# EAGLE board 8FA (EAGLE 9.4.2)
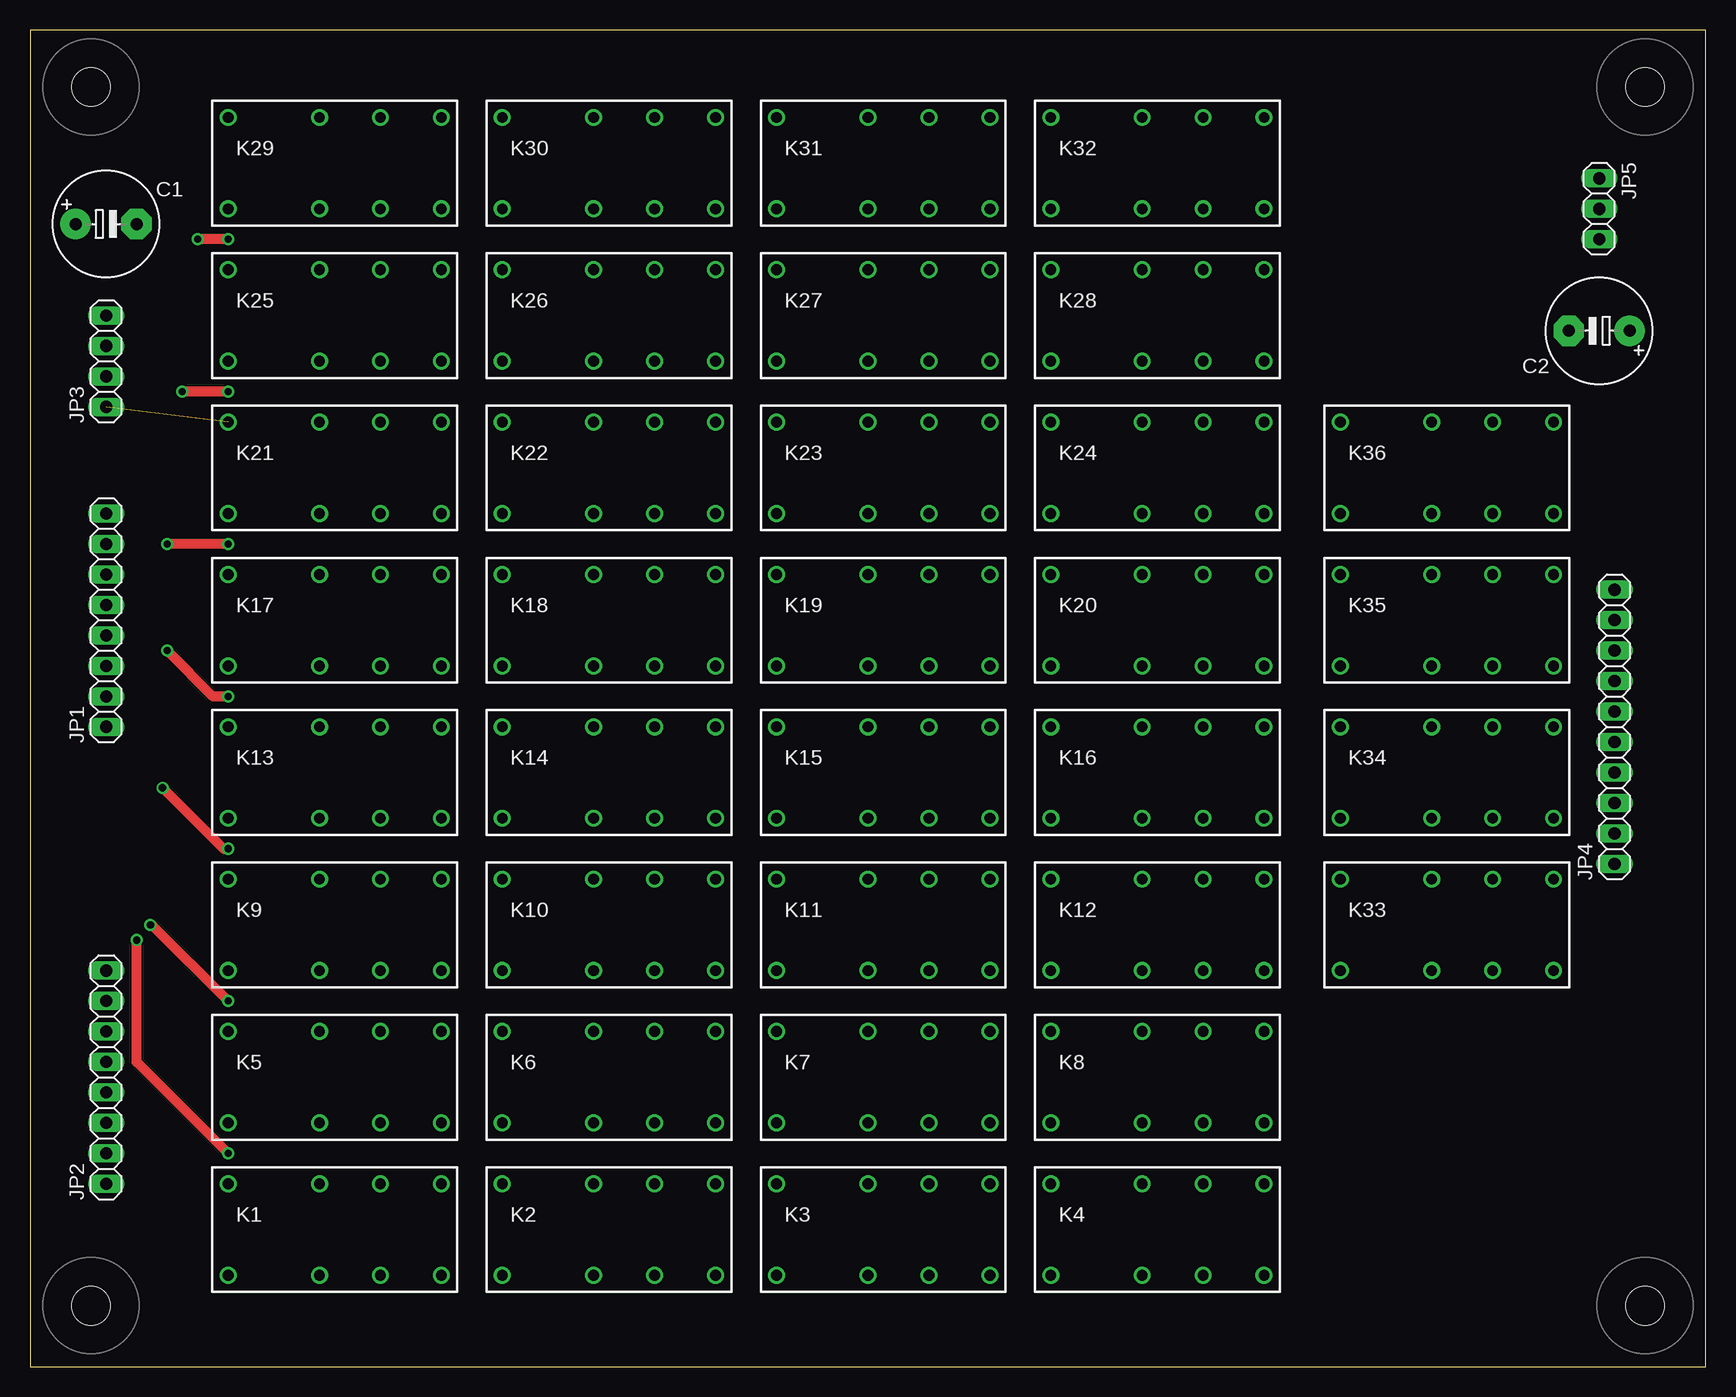
[diagram p0: board, top side]
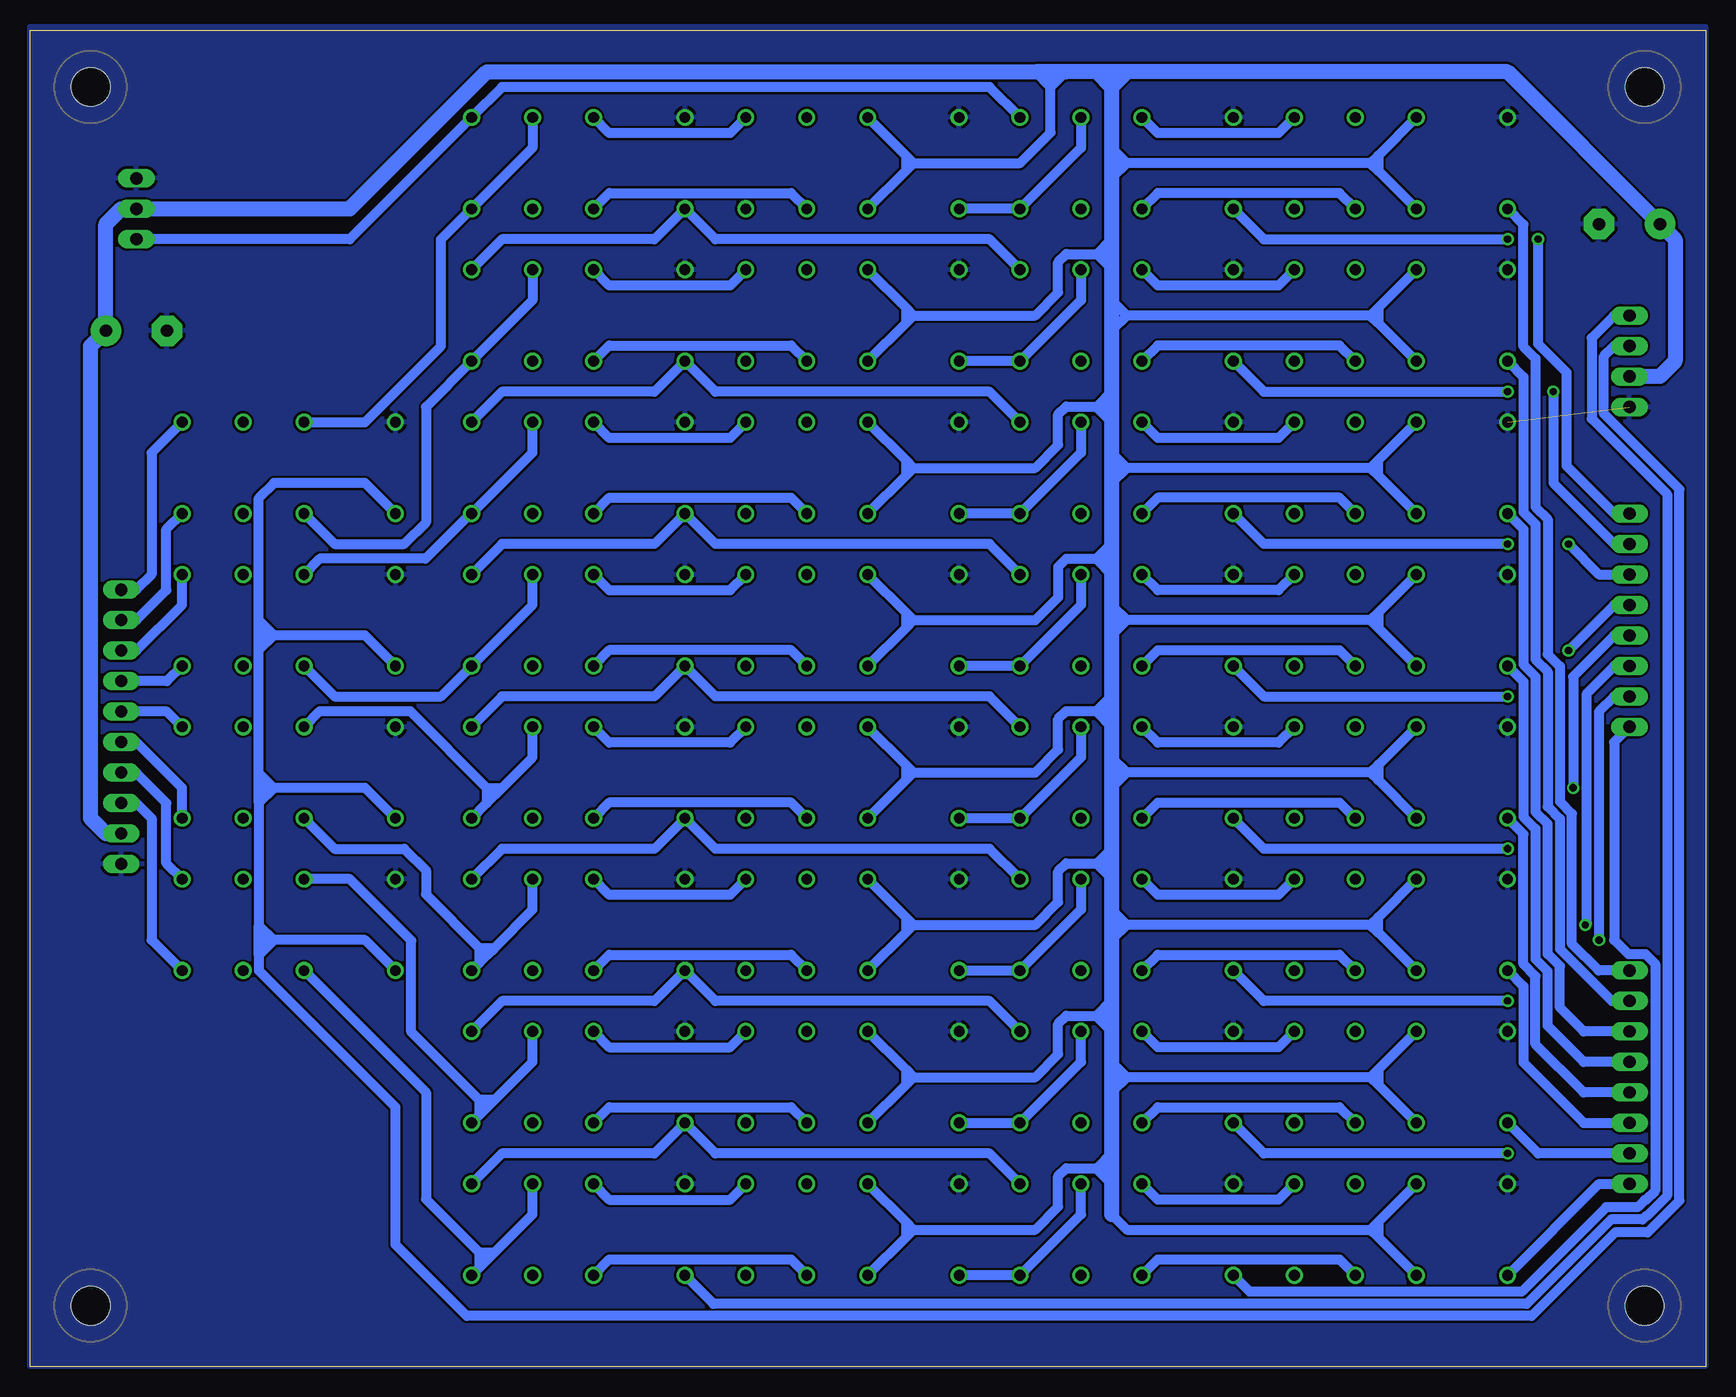
[diagram p1: board, bottom side, seen from below]

Size 139.68 x 111.43 mm. Coordinates in mm from the lower left corner, seen from the top.
Outline: 0,0 139.68,0 139.68,111.43 0,111.43 0,0
Copper layers (1*16): Top 0.0356mm / dielectric 1.5011mm / Bottom 0.0356mm
Design rules "formitaminimum": minimum track width 5mil, minimum drill 0.5994mm, track to track 0.2007mm, track to pad 0.2007mm, pad to pad 0.2007mm, via to via 0.2007mm, smd to smd 0mil, copper to edge 0mil, drill to drill 1mil, minimum pad ring 10mil, minimum via ring 8mil, stop-mask expansion 4mil, vias tented up to drill 1mm, thermal gap 10mil
Net classes: 0 default: width 0.813 mm

## Footprints (pad centres in the part's own frame; a part is rotated, then mirrored left to right if it is on the bottom)
E5-8,5 = drill 1.016 pad 2.54: + -2.54,0 | drill 1.016 pad 2.54 octagon: - 2.54,0
1X08 = drill 1.016 long: 1 -8.89,0; 2 -6.35,0; 3 -3.81,0; 4 -1.27,0; 5 1.27,0; 6 3.81,0; 7 6.35,0; 8 8.89,0
1X04 = drill 1.016 long: 1 -3.81,0; 2 -1.27,0; 3 1.27,0; 4 3.81,0
1X10 = drill 1.016 long: 1 -11.43,0; 2 -8.89,0; 3 -6.35,0; 4 -3.81,0; 5 -1.27,0; 6 1.27,0; 7 3.81,0; 8 6.35,0; 9 8.89,0; 10 11.43,0
1X03 = drill 1.016 long: 1 -2.54,0; 2 0,0; 3 2.54,0
DS-BT = drill 0.9: 1 -8.89,-3.81; 4 -1.27,-3.81; 6 3.81,-3.81; 8 8.89,-3.81; 9 8.89,3.81; 11 3.81,3.81; 13 -1.27,3.81; 16 -8.89,3.81
HOLE_3.2 = hole 3.2: 0,0

## Placement (x,y rotation side)
C1  [E5-8,5]  6.35,95.25 0 top
C2  [E5-8,5]  130.81,86.36 180 top
JP1  [1X08]  6.35,62.23 90 top
JP2  [1X08]  6.35,24.13 90 top
JP3  [1X04]  6.35,83.82 90 top
JP4  [1X10]  132.08,53.34 90 top
JP5  [1X03]  130.81,96.52 270 top
K1  RELAY5V  [DS-BT]  25.4,11.43 0 top
K2  RELAY5V  [DS-BT]  48.26,11.43 0 top
K3  RELAY5V  [DS-BT]  71.12,11.43 0 top
K4  RELAY5V  [DS-BT]  93.98,11.43 0 top
K5  RELAY5V  [DS-BT]  25.4,24.13 0 top
K6  RELAY5V  [DS-BT]  48.26,24.13 0 top
K7  RELAY5V  [DS-BT]  71.12,24.13 0 top
K8  RELAY5V  [DS-BT]  93.98,24.13 0 top
K9  RELAY5V  [DS-BT]  25.4,36.83 0 top
K10  RELAY5V  [DS-BT]  48.26,36.83 0 top
K11  RELAY5V  [DS-BT]  71.12,36.83 0 top
K12  RELAY5V  [DS-BT]  93.98,36.83 0 top
K13  RELAY5V  [DS-BT]  25.4,49.53 0 top
K14  RELAY5V  [DS-BT]  48.26,49.53 0 top
K15  RELAY5V  [DS-BT]  71.12,49.53 0 top
K16  RELAY5V  [DS-BT]  93.98,49.53 0 top
K17  RELAY5V  [DS-BT]  25.4,62.23 0 top
K18  RELAY5V  [DS-BT]  48.26,62.23 0 top
K19  RELAY5V  [DS-BT]  71.12,62.23 0 top
K20  RELAY5V  [DS-BT]  93.98,62.23 0 top
K21  RELAY5V  [DS-BT]  25.4,74.93 0 top
K22  RELAY5V  [DS-BT]  48.26,74.93 0 top
K23  RELAY5V  [DS-BT]  71.12,74.93 0 top
K24  RELAY5V  [DS-BT]  93.98,74.93 0 top
K25  RELAY5V  [DS-BT]  25.4,87.63 0 top
K26  RELAY5V  [DS-BT]  48.26,87.63 0 top
K27  RELAY5V  [DS-BT]  71.12,87.63 0 top
K28  RELAY5V  [DS-BT]  93.98,87.63 0 top
K29  RELAY5V  [DS-BT]  25.4,100.33 0 top
K30  RELAY5V  [DS-BT]  48.26,100.33 0 top
K31  RELAY5V  [DS-BT]  71.12,100.33 0 top
K32  RELAY5V  [DS-BT]  93.98,100.33 0 top
K33  RELAY5V  [DS-BT]  118.11,36.83 0 top
K34  RELAY5V  [DS-BT]  118.11,49.53 0 top
K35  RELAY5V  [DS-BT]  118.11,62.23 0 top
K36  RELAY5V  [DS-BT]  118.11,74.93 0 top
U$1  [HOLE_3.2]  5.08,106.68 0 top
U$2  [HOLE_3.2]  134.62,106.68 0 top
U$3  [HOLE_3.2]  134.62,5.08 0 top
U$4  [HOLE_3.2]  5.08,5.08 0 top

## Library data of the parts
C1 C2 = Passive_Robotech
JP1-JP5 = pinhead
K1-K36 = My
U$1-U$4 = Document_Robotech

## Nets
+5V: C1.+ C2.+ JP3.2 JP4.2 JP5.2 K1.4 K1.13 K3.4 K3.13 K5.4 K5.13 K7.4 K7.13 K9.4 K9.13 K11.4 K11.13 K13.4 K13.13 K15.4 K15.13 K17.4 K17.13 K19.4 K19.13 K21.4 K21.13 K23.4 K23.13 K25.4 K25.13 K27.4 K27.13 K29.4 K29.13 K31.4 K31.13
A1: JP2.1 K1.1
A2: JP2.2 K5.1
A3: JP2.3 K9.1
A4: JP2.4 K13.1
A5: JP2.5 K17.1
A6: JP2.6 K21.1
A7: JP2.7 K25.1
A8: JP2.8 K29.1
B1: JP1.1 K2.1
B2: JP1.2 K6.1
B3: JP1.3 K10.1
B4: JP1.4 K14.1
B5: JP1.5 K18.1
B6: JP1.6 K22.1
B7: JP1.7 K26.1
B8: JP1.8 K30.1
C1: K2.9 K4.9 K8.1
C2: K6.9 K8.9 K12.1
C3: K10.9 K12.9 K16.1
C4: K14.9 K16.9 K20.1
C5: K18.9 K20.9 K24.1
C6: K22.9 K24.9 K28.1
C7: K26.9 K28.9 K32.1
CIN: JP3.4 K4.1
COUT: JP5.3 K30.9 K32.9
ENABLE: JP3.3 K33.1 K34.1 K35.1 K36.1
GND: C1.- C2.- JP3.1 JP4.1 JP5.1 K1.16 K2.16 K3.16 K4.16 K5.16 K6.16 K7.16 K8.16 K9.16 K10.16 K11.16 K12.16 K13.16 K14.16 K15.16 K16.16 K17.16 K18.16 K19.16 K20.16 K21.16 K22.16 K23.16 K24.16 K25.16 K26.16 K27.16 K28.16 K29.16 K30.16 K31.16 K32.16 K33.16 K34.16 K35.16 K36.16
N$1: K3.9 K4.13
N$2: K1.9 K2.13
N$3: K1.6 K2.4
N$4: K3.6 K4.4
N$5: K5.9 K6.13
N$6: K5.6 K6.4
N$7: K7.9 K8.13
N$8: K7.6 K8.4
N$9: K9.9 K10.13
N$10: K9.6 K10.4
N$11: K11.9 K12.13
N$12: K11.6 K12.4
N$13: K13.9 K14.13
N$14: K13.6 K14.4
N$15: K15.9 K16.13
N$16: K15.6 K16.4
N$17: K17.9 K18.13
N$18: K17.6 K18.4
N$19: K19.9 K20.13
N$20: K19.6 K20.4
N$21: K21.9 K22.13
N$22: K21.6 K22.4
N$23: K23.9 K24.13
N$24: K23.6 K24.4
N$25: K25.9 K26.13
N$26: K25.6 K26.4
N$27: K27.9 K28.13
N$28: K27.6 K28.4
N$29: K29.9 K30.13
N$30: K29.6 K30.4
N$31: K31.9 K32.13
N$32: K31.6 K32.4
S0.5: K2.8 K2.11 K3.1
S1: K4.8 K4.11 K33.4
S1.5: K6.8 K6.11 K7.1
S1OUT: JP4.3 K33.8
S2: K8.8 K8.11 K33.13
S2.5: K10.8 K10.11 K11.1
S2OUT: JP4.4 K33.9
S3: K12.8 K12.11 K34.4
S3.5: K14.8 K14.11 K15.1
S3OUT: JP4.5 K34.8
S4: K16.8 K16.11 K34.13
S4.5: K18.8 K18.11 K19.1
S4OUT: JP4.6 K34.9
S5: K20.8 K20.11 K35.4
S5.5: K22.8 K22.11 K23.1
S5OUT: JP4.7 K35.8
S6: K24.8 K24.11 K35.13
S6.5: K26.8 K26.11 K27.1
S6OUT: JP4.8 K35.9
S7: K28.8 K28.11 K36.4
S7.5: K30.8 K30.11 K31.1
S7OUT: JP4.9 K36.8
S8: K32.8 K32.11 K36.13
S8OUT: JP4.10 K36.9

## Tracks (layer width: path | path; a pad name or v marks a point on that pad's centre or on a via)
+5V
  Bottom 0.813: 50.8,54.65 53.3,54.65 53.98,53.98 53.98,51.44 55.88,49.53 66.04,49.53 | 50.8,54.65 49.57,54.65 49.53,54.61 | 50.8,29.25 53.3,29.25 53.98,28.57 53.98,26.04 55.88,24.13 66.04,24.13 | 50.8,29.25 49.57,29.25 49.53,29.21 | 50.8,41.95 53.3,41.95 53.98,41.27 53.98,38.73 55.88,36.83 66.04,36.83 | 50.76,41.95 49.57,41.95 49.53,41.91 | K7.4 66.67,23.5 | 66.67,23.5 66.04,24.13 | 66.04,24.13 66.67,24.77 | 66.67,24.77 K7.13 | K3.13 66.67,12.06 | 66.67,12.06 66.04,11.43 | 66.04,11.43 66.67,10.79 | 66.67,10.79 K3.4 | K1.13 27.3,12.06 | 27.3,12.06 27.94,11.43 | 27.94,11.43 27.3,10.79 | 27.3,10.79 K1.4 | 27.3,12.06 27.3,10.79 | 27.94,24.13 27.3,23.5 | 27.3,23.5 K5.4 | K5.13 27.3,24.77 | 27.3,24.77 27.94,24.13 | 27.3,24.77 27.3,23.5 | 66.67,12.06 66.67,10.79 | 66.67,24.77 66.67,23.5 | K9.4 27.3,36.2 | 27.3,36.2 27.3,37.47 | K9.13 27.3,37.47 | 27.3,37.47 27.94,36.83 | 27.94,36.83 48.26,36.83 | 49.53,36.83 48.26,36.83 | 27.3,36.2 27.94,36.83 | 27.94,49.53 27.3,48.9 | 27.3,48.9 K13.4 | 27.94,49.53 48.26,49.53 | 48.26,49.53 49.53,49.53 | K13.13 27.3,50.16 | 27.3,50.16 27.94,49.53 | 27.3,50.16 27.3,48.9 | K17.13 27.3,62.87 | 27.3,62.87 27.94,62.23 | K17.4 27.3,61.59 | 27.3,61.59 27.94,62.23 | 27.3,62.87 27.3,61.59 | K21.13 27.3,75.56 | 27.3,75.56 27.94,74.93 | 27.94,74.93 48.26,74.93 | 48.26,74.93 49.53,74.93 | 27.94,74.93 27.3,74.3 | 27.3,74.3 K21.4 | 27.3,74.3 27.3,75.56 | K25.13 27.3,88.27 | 27.3,88.27 27.94,87.63 | 27.94,87.63 48.26,87.63 | K25.4 27.3,87 | 27.3,87 27.94,87.63 | 27.3,88.27 27.3,87 | K29.13 27.3,100.97 | 27.3,99.69 K29.4 | 27.3,100.97 27.3,99.69 | 27.3,100.97 27.94,100.33 | 27.94,100.33 48.26,100.33 | 27.3,99.69 27.94,100.33 | K11.13 66.67,37.47 | 66.67,37.47 66.04,36.83 | 66.04,36.83 66.67,36.2
  Bottom 0.813: 66.67,36.2 K11.4 | 66.67,37.47 66.67,36.2 | K15.13 66.67,50.16 | 66.67,50.16 66.04,49.53 | 66.04,49.53 66.67,48.9 | 66.67,48.9 K15.4 | 66.67,50.16 66.67,48.9 | 66.04,62.23 66.67,61.59 | 66.67,61.59 K19.4 | K19.13 66.67,62.87 | 66.67,62.87 66.04,62.23 | 66.67,62.87 66.67,61.59 | K23.13 66.67,75.56 | 66.67,75.56 66.04,74.93 | 66.04,74.93 66.67,74.3 | 66.67,74.3 K23.4 | 66.67,75.56 66.67,74.3 | 66.04,87.63 66.67,87 | 66.67,87 K27.4 | K27.13 66.67,88.27 | 66.67,88.27 66.04,87.63 | 66.67,88.27 66.67,87 | 66.04,100.33 66.67,99.69 | 66.67,99.69 K31.4 | K31.13 66.67,100.97 | 66.67,100.97 66.04,100.33 | 66.67,100.97 66.67,99.69 | 66.04,11.43 55.88,11.43 53.98,13.34 53.98,15.88 53.3,16.55 50.8,16.55 | 66.04,74.93 55.88,74.93 53.98,76.83 53.98,79.38 53.3,80.05 50.76,80.05 | 66.04,87.63 55.88,87.63 53.98,89.53 53.98,92.08 53.3,92.75 50.76,92.75 | 66.04,62.23 55.88,62.23 53.98,64.14 53.98,66.67 53.3,67.35 50.8,67.35 | 50.8,67.35 49.57,67.35 49.53,67.31 | 27.94,11.43 48.26,11.43 49.53,12.7 | 27.94,24.13 48.26,24.13 | 49.53,24.13 48.26,24.13 | 27.94,62.23 48.26,62.23 | 54.61,107.95 54.61,106.68 | 54.61,106.68 53.34,107.95 | 54.61,106.68 55.88,107.95 | 48.26,62.23 49.53,60.96 | 49.53,63.5 48.26,62.23 | 49.53,88.9 48.26,87.63 | 48.26,87.63 49.53,86.36 | 49.53,92.71 49.57,92.75 50.76,92.75 | 50.76,92.75 49.53,93.98 | 50.76,92.75 49.53,91.52 49.53,91.44 | 48.26,100.33 49.53,101.6 | 48.26,100.33 49.53,100.33 | 48.26,100.33 49.53,99.06 | 49.53,16.51 49.57,16.55 50.76,16.55 | 50.76,16.55 50.8,16.55 | 50.76,16.55 49.53,17.78 | 50.8,16.55 50.8,16.51 49.53,15.24 | 48.26,24.13 49.53,25.4 | 48.26,24.13 49.53,22.86 | 50.8,29.25 50.8,29.21 49.53,27.94 | 50.8,29.25 49.57,30.48 49.53,30.48
  Bottom 0.813: 48.26,36.83 49.53,35.56 | 48.26,36.83 49.53,38.1 | 50.8,41.95 49.53,40.68 49.53,40.64 | 50.8,41.95 50.76,41.95 | 50.76,41.95 49.53,43.18 | 48.26,49.53 49.53,48.26 | 48.26,49.53 49.53,50.8 | 50.8,54.65 50.8,54.61 49.53,53.34 | 50.8,54.65 49.57,55.88 49.53,55.88 | 48.26,62.23 49.53,62.23 | 50.8,67.35 49.57,68.58 49.53,68.58 | 50.8,67.35 50.8,67.31 49.53,66.04 | 49.53,73.66 48.26,74.93 | 48.26,74.93 49.53,76.2 | 49.53,80.01 49.57,80.05 50.76,80.05 | 49.53,81.28 50.76,80.05 | 50.76,80.05 50.76,79.97 49.53,78.74 | 66.04,100.33 57.15,100.33 54.61,102.87 54.61,106.68
  Bottom 1.27: JP3.2 3.81,82.55 2.54,83.82 2.54,93.98 C1.+ 16.51,107.95 48.26,107.95 | 49.53,107.95 50.8,107.95 | 50.8,107.95 53.34,107.95 54.61,107.95 55.88,107.95 101.6,107.95 113.03,96.52 JP5.2 132.08,96.52 133.35,95.25 C2.+ 134.62,85.09 134.62,45.72 133.35,44.45 JP4.2 | 48.26,107.95 49.53,107.95 | 49.53,106.68 49.53,107.95 | 49.53,106.68 48.26,107.95 | 50.8,107.95 49.53,106.68 | 49.53,106.68 49.53,101.6 49.53,100.33 49.53,99.06 49.53,93.98 49.53,92.71 49.53,91.44 49.53,88.9 49.53,86.36 49.53,81.28 49.53,80.01 49.53,78.74 49.53,76.2 49.53,74.93 49.53,73.66 49.53,68.58 49.53,67.31 49.53,66.04 49.53,63.5 49.53,62.23 49.53,60.96 49.53,55.88 49.53,54.61 49.53,53.34 49.53,50.8 49.53,49.53 49.53,48.26 49.53,43.18 49.53,41.91 49.53,40.64 49.53,38.1 49.53,36.83 49.53,35.56 49.53,30.48 49.53,29.21 49.53,27.94 49.53,25.4 49.53,24.13 49.53,22.86 49.53,17.78 49.53,16.51 49.53,15.24 49.53,12.7
A1
  Bottom 0.813: K1.1 8.89,15.24 JP2.1
A2
  Bottom 0.813: JP2.2 13.97,17.78 K5.1
A3
  Bottom 0.813: JP2.3 10.16,20.32 15.2,25.36 15.2,31.71 K9.1
A4
  Bottom 0.813: K13.1 15.2,44.41 15.2,33.56 14.19,32.55 14.19,26.89 10.16,22.86 JP2.4
A5
  Bottom 0.813: K17.1 15.2,57.11 15.2,45.84 14.19,44.83 14.19,33.98 13.17,32.97 13.17,28.41 10.16,25.4 JP2.5
A6
  Bottom 0.813: K21.1 15.2,69.81 15.2,58.54 14.19,57.53 14.19,46.26 13.17,45.25 13.17,34.4 12.16,33.39 12.16,29.94 10.16,27.94 JP2.6
A7
  Bottom 0.813: K25.1 15.2,82.51 15.2,71.24 14.19,70.23 14.19,58.96 13.17,57.95 13.17,46.68 12.16,45.67 12.16,34.82 7.82,30.48 JP2.7
A8
  Bottom 0.813: K29.1 15.2,95.21 15.2,85.05 14.19,84.03 14.19,71.66 13.17,70.65 13.17,59.38 12.16,58.37 12.16,47.1 11.14,46.09 11.14,35.24 8.92,33.02 JP2.8
B1
  Bottom 0.813: K2.1 38,6.25 15.34,6.25 8.3,13.29 5.67,13.29 5.08,13.87 5.02,13.87 4.22,14.67 4.22,33.59 5.02,34.39 6.45,34.39 7.62,35.56 7.62,52.07 JP1.1
B2  (via drill 0.6)
  Top 0.813: v16.51,17.78 8.89,25.4 v8.89,35.56
  Bottom 0.813: v16.51,17.78 36.83,17.78 K6.1 | JP1.2 7.62,55.88 8.89,54.61 v8.89,35.56
B3  (via drill 0.6)
  Top 0.813: v16.51,30.48 10.16,36.83 v10.04,36.83
  Bottom 0.813: v16.51,30.48 36.83,30.48 K10.1 | JP1.3 7.62,58.42 9.9,56.14 9.9,36.96 v10.04,36.83
B4  (via drill 0.6)
  Top 0.813: v11.05,48.26 16.13,43.18 v16.51,43.18
  Bottom 0.813: v16.51,43.18 36.83,43.18 K14.1 | JP1.4 7.62,60.96 11.05,57.53 v11.05,48.26
B5  (via drill 0.6)
  Top 0.813: v16.51,55.88 15.24,55.88 v11.43,59.69
  Bottom 0.813: K18.1 36.83,55.88 v16.51,55.88 | JP1.5 7.62,63.5 v11.43,59.69
B6  (via drill 0.6)
  Top 0.813: v16.51,68.58 v11.43,68.58
  Bottom 0.813: v16.51,68.58 36.83,68.58 K22.1 | v11.43,68.58 8.89,66.04 JP1.6
B7  (via drill 0.6)
  Top 0.813: v16.51,81.28 v12.7,81.28
  Bottom 0.813: v16.51,81.28 36.83,81.28 K26.1 | v12.7,81.28 12.7,73.66 7.62,68.58 JP1.7
B8  (via drill 0.6)
  Top 0.813: v16.51,93.98 v13.97,93.98
  Bottom 0.813: v16.51,93.98 36.83,93.98 K30.1 | JP1.8 7.62,71.12 11.59,75.09 11.59,82.87 13.97,85.25 v13.97,93.98
C1
  Bottom 0.813: K4.9 100.33,17.78 87.63,17.78 K8.1 82.55,17.78 59.69,17.78 K2.9
C2
  Bottom 0.813: K8.9 100.33,30.48 87.63,30.48 K12.1 82.55,30.48 59.69,30.48 K6.9
C3
  Bottom 0.813: K12.9 100.33,43.18 87.63,43.18 K16.1 82.55,43.18 59.69,43.18 K10.9
C4
  Bottom 0.813: K16.9 100.33,55.88 87.63,55.88 K20.1 82.55,55.88 59.69,55.88 K14.9
C5
  Bottom 0.813: K20.9 100.33,68.58 87.63,68.58 K24.1 82.55,68.58 59.69,68.58 K18.9
C6
  Bottom 0.813: K24.9 100.33,81.28 87.63,81.28 K28.1 82.55,81.28 59.69,81.28 K22.9
C7
  Bottom 0.813: K28.9 100.33,93.98 87.63,93.98 K32.1 82.55,93.98 59.69,93.98 K26.9
CIN
  Bottom 0.813: K4.1 82.71,5.24 14.92,5.24 7.89,12.27 5.25,12.27 4.98,12.54 4.92,12.54 3.21,14.25 3.21,72.73 9.5,79.02 9.5,85.75 7.62,87.63 JP3.4
COUT
  Bottom 0.813: K30.9 59.69,106.68 100.33,106.68 K32.9 113.03,93.98 JP5.3
ENABLE
  Bottom 0.813: 120.61,46.99 120.61,48.26 | 120.61,48.26 120.61,49.49 | 120.61,49.49 120.61,59.73 | 120.61,59.73 120.61,60.96 | 120.61,60.96 120.61,62.23 | 120.61,62.23 120.61,72.39 119.34,73.66 111.76,73.66 K36.1 | K35.1 111.76,60.96 119.38,60.96 | 119.38,60.96 120.61,60.96 | 119.38,60.96 120.61,59.73 | 119.38,60.96 119.38,61 120.61,62.23 | K34.1 111.76,48.26 119.38,48.26 | 119.38,48.26 120.61,48.26 | 119.38,48.26 120.61,49.49 | 119.38,48.26 119.38,48.22 120.61,46.99 | K33.1 111.76,35.56 119.38,35.56 | 120.61,36.79 119.38,35.56 | 120.61,46.99 120.61,36.79 | 120.61,34.29 120.61,33.02 109.22,21.63 109.22,10.16 103.28,4.22 14.5,4.22 7.54,11.19 4.84,11.19 2.19,13.83 2.19,73.15 8.48,79.44 8.48,84.23 7.62,85.09 JP3.3 | 120.61,34.29 120.61,35.56 | 120.61,35.56 120.61,36.79 | 119.38,35.56 120.61,35.56 | 119.38,35.56 119.38,35.52 120.61,34.29
GND  (1 unrouted)
  pour Bottom: 0,111.76 0,0 139.7,0 139.7,111.76
N$1
  Bottom 0.813: K3.9 81.32,13.93 91.4,13.93 K4.13
N$2
  Bottom 0.813: K2.13 45.68,13.93 35.6,13.93 K1.9
N$3
  Bottom 0.813: K1.6 30.52,8.93 45.68,8.93 K2.4
N$4
  Bottom 0.813: K3.6 76.24,8.93 91.4,8.93 K4.4
N$5
  Bottom 0.813: K5.9 35.6,26.63 45.68,26.63 K6.13
N$6
  Bottom 0.813: K5.6 30.52,21.63 45.68,21.63 K6.4
N$7
  Bottom 0.813: K7.9 81.32,26.63 91.4,26.63 K8.13
N$8
  Bottom 0.813: K7.6 76.24,21.63 91.4,21.63 K8.4
N$9
  Bottom 0.813: K10.13 45.68,39.33 35.6,39.33 K9.9
N$10
  Bottom 0.813: K9.6 30.52,34.33 45.68,34.33 K10.4
N$11
  Bottom 0.813: K12.13 91.4,39.33 81.32,39.33 K11.9
N$12
  Bottom 0.813: K11.6 76.24,34.33 91.4,34.33 K12.4
N$13
  Bottom 0.813: K14.13 45.68,52.03 35.6,52.03 K13.9
N$14
  Bottom 0.813: K13.6 30.52,47.03 45.68,47.03 K14.4
N$15
  Bottom 0.813: K16.13 91.4,52.03 81.32,52.03 K15.9
N$16
  Bottom 0.813: K16.4 91.4,47.03 76.24,47.03 K15.6
N$17
  Bottom 0.813: K18.13 45.68,64.73 35.6,64.73 K17.9
N$18
  Bottom 0.813: K17.6 30.52,59.73 45.68,59.73 K18.4
N$19
  Bottom 0.813: K19.9 81.32,64.73 91.4,64.73 K20.13
N$20
  Bottom 0.813: K20.4 91.4,59.73 76.24,59.73 K19.6
N$21
  Bottom 0.813: K22.13 45.68,77.43 35.6,77.43 K21.9
N$22
  Bottom 0.813: K22.4 45.68,72.43 30.52,72.43 K21.6
N$23
  Bottom 0.813: K24.13 91.4,77.43 81.32,77.43 K23.9
N$24
  Bottom 0.813: K23.6 76.24,72.43 91.4,72.43 K24.4
N$25
  Bottom 0.813: K26.13 45.68,90.13 35.6,90.13 K25.9
N$26
  Bottom 0.813: K26.4 45.68,85.13 30.52,85.13 K25.6
N$27
  Bottom 0.813: K28.13 91.4,90.13 81.32,90.13 K27.9
N$28
  Bottom 0.813: K27.6 76.24,85.13 91.4,85.13 K28.4
N$29
  Bottom 0.813: K30.13 45.68,102.83 35.6,102.83 K29.9
N$30
  Bottom 0.813: K30.4 45.68,97.83 30.52,97.83 K29.6
N$31
  Bottom 0.813: K32.13 91.4,102.83 81.32,102.83 K31.9
N$32
  Bottom 0.813: K31.6 76.24,97.83 91.4,97.83 K32.4
S0.5
  Bottom 0.813: K3.1 K2.8 52.07,12.7 K2.11
S1
  Bottom 0.813: K4.8 102.23,8.26 | 102.23,8.26 100.96,9.53 | K4.11 97.79,12.7 100.96,9.53 | 102.23,9.53 106.68,13.97 106.68,22.86 K33.4 | 102.23,9.53 100.96,9.53 | 102.23,9.53 102.23,8.26
S1.5
  Bottom 0.813: K7.1 K6.8 52.07,25.4 K6.11
S1OUT
  Bottom 0.813: K33.8 129.54,35.56 129.54,45.72 130.81,46.99 JP4.3
S2
  Bottom 0.813: K8.8 102.23,20.95 | 102.23,20.95 101.6,21.59 | K8.11 97.79,25.4 100.96,22.23 | 102.23,22.23 101.6,21.59 | 102.23,22.23 102.23,20.95 | 101.6,21.59 100.96,22.23 | 100.96,22.23 102.23,22.23 | 102.23,22.23 107.91,27.9 107.91,35.52 113.03,40.64 K33.13
S2.5
  Bottom 0.813: K10.11 52.07,38.1 K10.8 K11.1
S2OUT
  Bottom 0.813: K33.9 128.31,41.95 128.31,46.99 130.81,49.49 130.81,49.53 JP4.4
S3
  Bottom 0.813: 100.96,34.92 97.79,38.1 K12.11 | K34.4 114.3,43.18 108.47,43.18 106.68,41.39 106.68,39.37 102.23,34.92 | 100.96,34.92 101.6,34.29 | 101.6,34.29 102.23,33.66 | 102.23,33.66 K12.8 | 102.23,34.92 100.96,34.92 | 102.23,34.92 101.6,34.29 | 102.23,34.92 102.23,33.66
S3.5
  Bottom 0.813: K14.11 52.07,50.8 K14.8 K15.1
S3OUT
  Bottom 0.813: K34.8 127,48.26 130.81,52.07 JP4.5
S4
  Bottom 0.813: K16.8 101.6,46.99 | 101.6,46.99 100.33,48.26 | 100.33,48.26 97.79,50.8 K16.11 | K34.13 115.53,54.65 107.99,54.65 101.6,48.26 | 101.6,48.26 100.33,48.26 | 101.6,48.26 101.6,46.99
S4.5
  Bottom 0.813: K18.11 52.07,63.5 K18.8 K19.1
S4OUT
  Bottom 0.813: K34.9 128.27,54.61 JP4.6
S5
  Bottom 0.813: K20.11 97.79,63.5 K20.8 105.41,55.88 114.3,55.88 K35.4
S5.5
  Bottom 0.813: K22.11 52.07,76.2 K22.8 K23.1
S5OUT
  Bottom 0.813: K35.8 128.27,57.15 JP4.7
S6
  Bottom 0.813: K24.11 97.79,76.2 K24.8 102.95,71.12 106.72,67.35 115.53,67.35 K35.13
S6.5
  Bottom 0.813: K26.11 52.07,88.9 K26.8 K27.1
S6OUT
  Bottom 0.813: K35.9 127,63.5 130.81,59.69 JP4.8
S7
  Bottom 0.813: K28.11 97.79,88.9 K28.8 106.68,80.01 106.68,70.37 108.47,68.58 114.3,68.58 K36.4
S7.5
  Bottom 0.813: K30.11 52.07,101.6 K30.8 K31.1
S7OUT
  Bottom 0.813: K36.8 128.31,69.81 128.31,64.73 130.81,62.23 JP4.9
S8
  Bottom 0.813: K32.11 97.79,101.6 K32.8 105.41,93.98 105.41,85.09 111.76,78.74 K36.13
S8OUT
  Bottom 0.813: K36.9 129.54,76.2 129.54,66.04 130.81,64.77 JP4.10